# Altium PCB motordriver-v4.0.PcbDoc
Units mil, origin at the board's own origin, x right, y up, seen from the top; angles counter-clockwise.
Board outline 6000 x 4000 mil, 2 copper layers (Top Layer, Bottom Layer); 130 components, 113 nets, 485 pads, 0 vias.
Unrouted connection lines stored in the file: 282.
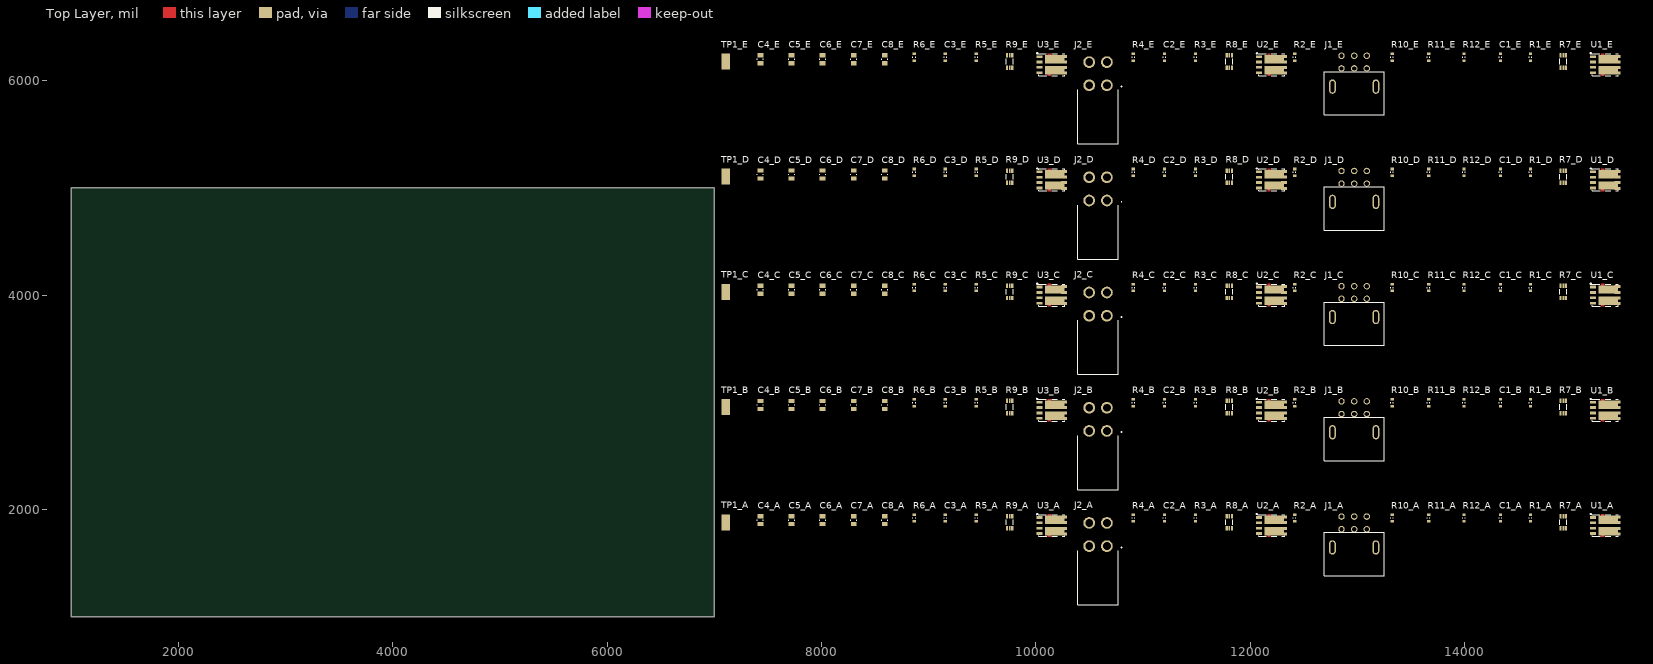
[diagram p0: Top Layer view]
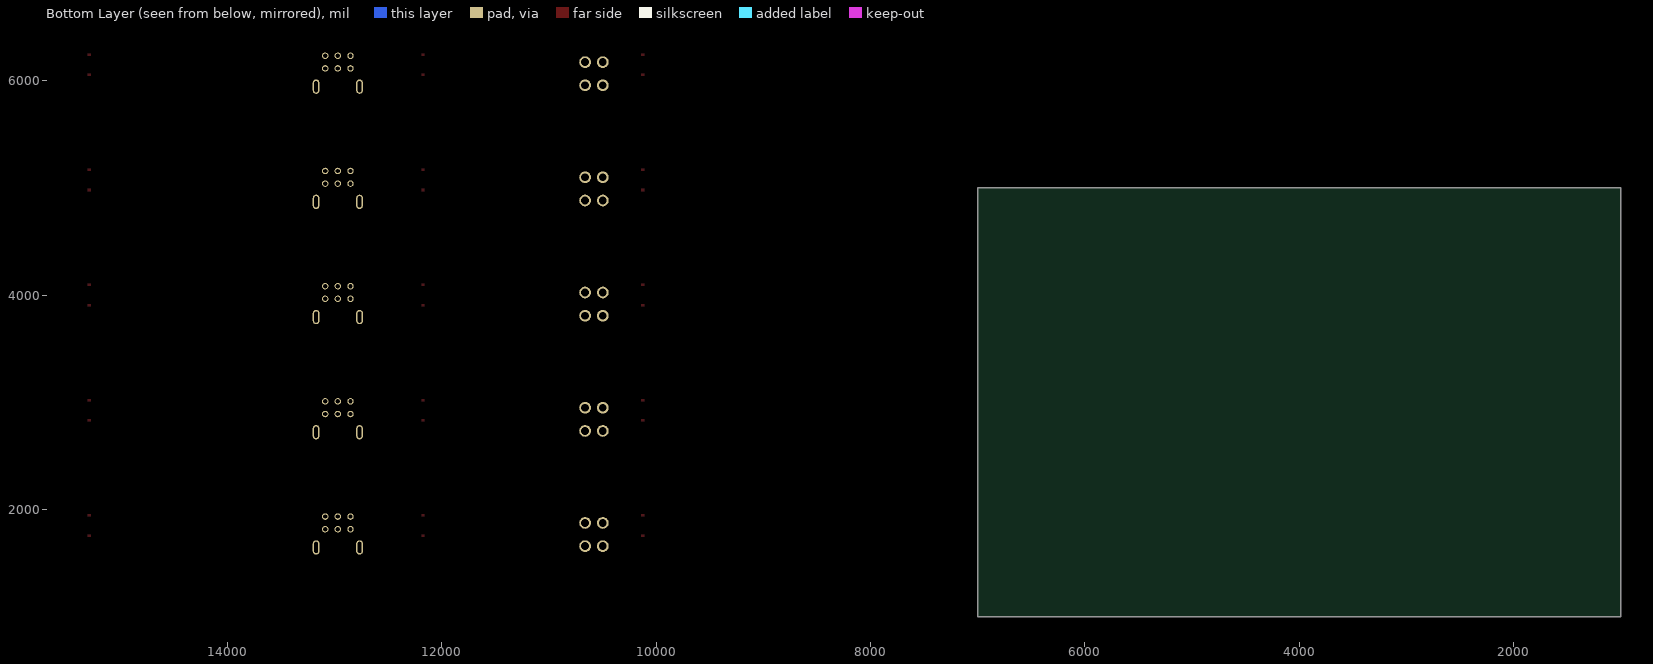
[diagram p1: Bottom Layer view, seen from below]

## Layer stack, top to bottom
Top Solder: solder mask 0.4, Solder Resist, Dk 3.5
Top Layer: signal copper 1.4
Dielectric 1: dielectric 12.6, FR-4, Dk 4.8
Bottom Layer: signal copper 1.4
Bottom Solder: solder mask 0.4, Solder Resist, Dk 3.5

## Board outline
1000,1000 7000,1000 7000,5000 1000,5000

## Design rules (kind name [scope] priority, off if disabled: settings)
Clearance [All] p1: gap=10 ignorepadtopadclearanceinfootprint=FALSE except(0: Arc-Hole Track-Hole SMDPad-Hole THPad-Hole Via-Hole Fill-Hole Poly-Hole Region-Hole Text-Hole)
PolygonConnect [All] p1: connectstyle=Relief reliefconductorwidth=10 reliefentries=4 polygonreliefangle="90 Angle" airgapwidth=10
RoomDefinition "Power Stage E" [InComponentClass('Power Stage E')] p1: confinementstyle=ConfineIn formatcopy=TRUE lockcomponents=FALSE outline 7045,5360 15470,5360 15470,6385 7045,6385
RoomDefinition "Power Stage D" [InComponentClass('Power Stage D')] p2: confinementstyle=ConfineIn formatcopy=TRUE lockcomponents=FALSE outline 7045,4285 15470,4285 15470,5310 7045,5310
RoomDefinition "Power Stage C" [InComponentClass('Power Stage C')] p3: confinementstyle=ConfineIn formatcopy=TRUE lockcomponents=FALSE outline 7045,3210 15470,3210 15470,4235 7045,4235
RoomDefinition "Power Stage B" [InComponentClass('Power Stage B')] p4: confinementstyle=ConfineIn formatcopy=TRUE lockcomponents=FALSE outline 7045,2135 15470,2135 15470,3160 7045,3160
RoomDefinition "Power Stage A" [InComponentClass('Power Stage A')] p5: confinementstyle=ConfineIn formatcopy=TRUE lockcomponents=FALSE outline 7045,1060 15470,1060 15470,2085 7045,2085
RoutingVias [All] p1: holewidth=28 width=50 viastyle="Through Hole" minholewidth=28 minwidth=50 maxholewidth=28 maxwidth=50
SolderMaskExpansion [All] p1: expansion=4 istentingtop=FALSE
Width [All] p1: maxlimit=10 minlimit=10 preferedwidth=10
30 further rules are at their usual default settings.

## Classes and differential pairs
channel class motordriver-v4.0_stspin: "STSPIN A" "STSPIN B" "STSPIN C" "STSPIN D" "STSPIN E"
component class "Power Stage E": C1_E C2_E C3_E C4_E C5_E C6_E C7_E C8_E J1_E J2_E R1_E R2_E R3_E R4_E R5_E R6_E R7_E R8_E R9_E R10_E R11_E R12_E TP1_E U1_E U2_E U3_E
component class "Power Stage D": C1_D C2_D C3_D C4_D C5_D C6_D C7_D C8_D J1_D J2_D R1_D R2_D R3_D R4_D R5_D R6_D R7_D R8_D R9_D R10_D R11_D R12_D TP1_D U1_D U2_D U3_D
component class "Power Stage C": C1_C C2_C C3_C C4_C C5_C C6_C C7_C C8_C J1_C J2_C R1_C R2_C R3_C R4_C R5_C R6_C R7_C R8_C R9_C R10_C R11_C R12_C TP1_C U1_C U2_C U3_C
component class "Power Stage B": C1_B C2_B C3_B C4_B C5_B C6_B C7_B C8_B J1_B J2_B R1_B R2_B R3_B R4_B R5_B R6_B R7_B R8_B R9_B R10_B R11_B R12_B TP1_B U1_B U2_B U3_B
component class "Power Stage A": C1_A C2_A C3_A C4_A C5_A C6_A C7_A C8_A J1_A J2_A R1_A R2_A R3_A R4_A R5_A R6_A R7_A R8_A R9_A R10_A R11_A R12_A TP1_A U1_A U2_A U3_A
channel class motordriver-v4.0_power-stage: "Power Stage 1" "Power Stage 2"

## Components (designator, comment, footprint, x,y, rotation, side; value= is the part's Value field where it differs from the comment)
C1_A "100nF 50V" 0603 14335,1920 r90 top value=100nF (schematic designator C1)
C1_B "100nF 50V" 0603 14335,2995 r90 top value=100nF (schematic designator C1)
C1_C "100nF 50V" 0603 14335,4070 r90 top value=100nF (schematic designator C1)
C1_D "100nF 50V" 0603 14335,5145 r90 top value=100nF (schematic designator C1)
C1_E "100nF 50V" 0603 14335,6220 r90 top value=100nF (schematic designator C1)
C2_A "100nF 50V" 0603 11200,1920 r90 top value=100nF (schematic designator C2)
C2_B "100nF 50V" 0603 11200,2995 r90 top value=100nF (schematic designator C2)
C2_C "100nF 50V" 0603 11200,4070 r90 top value=100nF (schematic designator C2)
C2_D "100nF 50V" 0603 11200,5145 r90 top value=100nF (schematic designator C2)
C2_E "100nF 50V" 0603 11200,6220 r90 top value=100nF (schematic designator C2)
C3_A "100nF 50V" 0603 9155,1920 r90 top value=100nF (schematic designator C3)
C3_B "100nF 50V" 0603 9155,2995 r90 top value=100nF (schematic designator C3)
C3_C "100nF 50V" 0603 9155,4070 r90 top value=100nF (schematic designator C3)
C3_D "100nF 50V" 0603 9155,5145 r90 top value=100nF (schematic designator C3)
C3_E "100nF 50V" 0603 9155,6220 r90 top value=100nF (schematic designator C3)
C4_A "10uF 50V" 0805 7430,1900 r90 top value=10uF (schematic designator C4)
C4_B "10uF 50V" 0805 7430,2975 r90 top value=10uF (schematic designator C4)
C4_C "10uF 50V" 0805 7430,4050 r90 top value=10uF (schematic designator C4)
C4_D "10uF 50V" 0805 7430,5125 r90 top value=10uF (schematic designator C4)
C4_E "10uF 50V" 0805 7430,6200 r90 top value=10uF (schematic designator C4)
C5_A "10uF 50V" 0805 7720,1900 r90 top value=10uF (schematic designator C5)
C5_B "10uF 50V" 0805 7720,2975 r90 top value=10uF (schematic designator C5)
C5_C "10uF 50V" 0805 7720,4050 r90 top value=10uF (schematic designator C5)
C5_D "10uF 50V" 0805 7720,5125 r90 top value=10uF (schematic designator C5)
C5_E "10uF 50V" 0805 7720,6200 r90 top value=10uF (schematic designator C5)
C6_A "10uF 50V" 0805 8010,1900 r90 top value=10uF (schematic designator C6)
C6_B "10uF 50V" 0805 8010,2975 r90 top value=10uF (schematic designator C6)
C6_C "10uF 50V" 0805 8010,4050 r90 top value=10uF (schematic designator C6)
C6_D "10uF 50V" 0805 8010,5125 r90 top value=10uF (schematic designator C6)
C6_E "10uF 50V" 0805 8010,6200 r90 top value=10uF (schematic designator C6)
C7_A "10uF 50V" 0805 8300,1900 r90 top value=10uF (schematic designator C7)
C7_B "10uF 50V" 0805 8300,2975 r90 top value=10uF (schematic designator C7)
C7_C "10uF 50V" 0805 8300,4050 r90 top value=10uF (schematic designator C7)
C7_D "10uF 50V" 0805 8300,5125 r90 top value=10uF (schematic designator C7)
C7_E "10uF 50V" 0805 8300,6200 r90 top value=10uF (schematic designator C7)
C8_A "10uF 50V" 0805 8590,1900 r90 top value=10uF (schematic designator C8)
C8_B "10uF 50V" 0805 8590,2975 r90 top value=10uF (schematic designator C8)
C8_C "10uF 50V" 0805 8590,4050 r90 top value=10uF (schematic designator C8)
C8_D "10uF 50V" 0805 8590,5125 r90 top value=10uF (schematic designator C8)
C8_E "10uF 50V" 0805 8590,6200 r90 top value=10uF (schematic designator C8)
J1_A "CN HDR 6POS Molex 43045-0622 (R)" 430450622 12970,1645 r0 top (schematic designator J1)
J1_B "CN HDR 6POS Molex 43045-0622 (R)" 430450622 12970,2720 r0 top (schematic designator J1)
J1_C "CN HDR 6POS Molex 43045-0622 (R)" 430450622 12970,3795 r0 top (schematic designator J1)
J1_D "CN HDR 6POS Molex 43045-0622 (R)" 430450622 12970,4870 r0 top (schematic designator J1)
J1_E "CN HDR 6POS Molex 43045-0622 (R)" 430450622 12970,5945 r0 top (schematic designator J1)
J2_A "CN HDR 4POS Molex 26013115 (R)" 26013115 10580,1370 r0 top (schematic designator J2)
J2_B "CN HDR 4POS Molex 26013115 (R)" 26013115 10580,2445 r0 top (schematic designator J2)
J2_C "CN HDR 4POS Molex 26013115 (R)" 26013115 10580,3520 r0 top (schematic designator J2)
J2_D "CN HDR 4POS Molex 26013115 (R)" 26013115 10580,4595 r0 top (schematic designator J2)
J2_E "CN HDR 4POS Molex 26013115 (R)" 26013115 10580,5670 r0 top (schematic designator J2)
R1_A "495k" 0603 14615,1920 r90 top (schematic designator R1)
R1_B "495k" 0603 14615,2995 r90 top (schematic designator R1)
R1_C "495k" 0603 14615,4070 r90 top (schematic designator R1)
R1_D "495k" 0603 14615,5145 r90 top (schematic designator R1)
R1_E "495k" 0603 14615,6220 r90 top (schematic designator R1)
R2_A "495k" 0603 12415,1920 r90 top (schematic designator R2)
R2_B "495k" 0603 12415,2995 r90 top (schematic designator R2)
R2_C "495k" 0603 12415,4070 r90 top (schematic designator R2)
R2_D "495k" 0603 12415,5145 r90 top (schematic designator R2)
R2_E "495k" 0603 12415,6220 r90 top (schematic designator R2)
R3_A "495k" 0603 11490,1920 r90 top (schematic designator R3)
R3_B "495k" 0603 11490,2995 r90 top (schematic designator R3)
R3_C "495k" 0603 11490,4070 r90 top (schematic designator R3)
R3_D "495k" 0603 11490,5145 r90 top (schematic designator R3)
R3_E "495k" 0603 11490,6220 r90 top (schematic designator R3)
R4_A "495k" 0603 10910,1920 r90 top (schematic designator R4)
R4_B "495k" 0603 10910,2995 r90 top (schematic designator R4)
R4_C "495k" 0603 10910,4070 r90 top (schematic designator R4)
R4_D "495k" 0603 10910,5145 r90 top (schematic designator R4)
R4_E "495k" 0603 10910,6220 r90 top (schematic designator R4)
R5_A "495k" 0603 9445,1920 r90 top (schematic designator R5)
R5_B "495k" 0603 9445,2995 r90 top (schematic designator R5)
R5_C "495k" 0603 9445,4070 r90 top (schematic designator R5)
R5_D "495k" 0603 9445,5145 r90 top (schematic designator R5)
R5_E "495k" 0603 9445,6220 r90 top (schematic designator R5)
R6_A "495k" 0603 8865,1920 r90 top (schematic designator R6)
R6_B "495k" 0603 8865,2995 r90 top (schematic designator R6)
R6_C "495k" 0603 8865,4070 r90 top (schematic designator R6)
R6_D "495k" 0603 8865,5145 r90 top (schematic designator R6)
R6_E "495k" 0603 8865,6220 r90 top (schematic designator R6)
R7_A "RES 20m 1W" "1206 - Sense" 14920,1880 r90 top (schematic designator R7)
R7_B "RES 20m 1W" "1206 - Sense" 14920,2955 r90 top (schematic designator R7)
R7_C "RES 20m 1W" "1206 - Sense" 14920,4030 r90 top (schematic designator R7)
R7_D "RES 20m 1W" "1206 - Sense" 14920,5105 r90 top (schematic designator R7)
R7_E "RES 20m 1W" "1206 - Sense" 14920,6180 r90 top (schematic designator R7)
R8_A "RES 20m 1W" "1206 - Sense" 11805,1880 r90 top (schematic designator R8)
R8_B "RES 20m 1W" "1206 - Sense" 11805,2955 r90 top (schematic designator R8)
R8_C "RES 20m 1W" "1206 - Sense" 11805,4030 r90 top (schematic designator R8)
R8_D "RES 20m 1W" "1206 - Sense" 11805,5105 r90 top (schematic designator R8)
R8_E "RES 20m 1W" "1206 - Sense" 11805,6180 r90 top (schematic designator R8)
R9_A "RES 20m 1W" "1206 - Sense" 9755,1880 r90 top (schematic designator R9)
R9_B "RES 20m 1W" "1206 - Sense" 9755,2955 r90 top (schematic designator R9)
R9_C "RES 20m 1W" "1206 - Sense" 9755,4030 r90 top (schematic designator R9)
R9_D "RES 20m 1W" "1206 - Sense" 9755,5105 r90 top (schematic designator R9)
R9_E "RES 20m 1W" "1206 - Sense" 9755,6180 r90 top (schematic designator R9)
R10_A "10k" 0603 13325,1920 r90 top (schematic designator R10)
R10_B "10k" 0603 13325,2995 r90 top (schematic designator R10)
R10_C "10k" 0603 13325,4070 r90 top (schematic designator R10)
R10_D "10k" 0603 13325,5145 r90 top (schematic designator R10)
R10_E "10k" 0603 13325,6220 r90 top (schematic designator R10)
R11_A "10k" 0603 13665,1920 r90 top (schematic designator R11)
R11_B "10k" 0603 13665,2995 r90 top (schematic designator R11)
R11_C "10k" 0603 13665,4070 r90 top (schematic designator R11)
R11_D "10k" 0603 13665,5145 r90 top (schematic designator R11)
R11_E "10k" 0603 13665,6220 r90 top (schematic designator R11)
R12_A "10k" 0603 13995,1920 r90 top (schematic designator R12)
R12_B "10k" 0603 13995,2995 r90 top (schematic designator R12)
R12_C "10k" 0603 13995,4070 r90 top (schematic designator R12)
R12_D "10k" 0603 13995,5145 r90 top (schematic designator R12)
R12_E "10k" 0603 13995,6220 r90 top (schematic designator R12)
TP1_A "Test Point - 5019" TP380X203 7105,1880 r90 top (schematic designator TP1)
TP1_B "Test Point - 5019" TP380X203 7105,2955 r90 top (schematic designator TP1)
TP1_C "Test Point - 5019" TP380X203 7105,4030 r90 top (schematic designator TP1)
TP1_D "Test Point - 5019" TP380X203 7105,5105 r90 top (schematic designator TP1)
TP1_E "Test Point - 5019" TP380X203 7105,6180 r90 top (schematic designator TP1)
U1_A "NOTE: Nearing End of Life" PG-TDSON-8-10 15315,1850 r0 top (schematic designator U1)
U1_B "NOTE: Nearing End of Life" PG-TDSON-8-10 15315,2925 r0 top (schematic designator U1)
U1_C "NOTE: Nearing End of Life" PG-TDSON-8-10 15315,4000 r0 top (schematic designator U1)
U1_D "NOTE: Nearing End of Life" PG-TDSON-8-10 15315,5075 r0 top (schematic designator U1)
U1_E "NOTE: Nearing End of Life" PG-TDSON-8-10 15315,6150 r0 top (schematic designator U1)
U2_A "NOTE: Nearing End of Life" PG-TDSON-8-10 12200,1850 r0 top (schematic designator U2)
U2_B "NOTE: Nearing End of Life" PG-TDSON-8-10 12200,2925 r0 top (schematic designator U2)
U2_C "NOTE: Nearing End of Life" PG-TDSON-8-10 12200,4000 r0 top (schematic designator U2)
U2_D "NOTE: Nearing End of Life" PG-TDSON-8-10 12200,5075 r0 top (schematic designator U2)
U2_E "NOTE: Nearing End of Life" PG-TDSON-8-10 12200,6150 r0 top (schematic designator U2)
U3_A "NOTE: Nearing End of Life" PG-TDSON-8-10 10150,1850 r0 top (schematic designator U3)
U3_B "NOTE: Nearing End of Life" PG-TDSON-8-10 10150,2925 r0 top (schematic designator U3)
U3_C "NOTE: Nearing End of Life" PG-TDSON-8-10 10150,4000 r0 top (schematic designator U3)
U3_D "NOTE: Nearing End of Life" PG-TDSON-8-10 10150,5075 r0 top (schematic designator U3)
U3_E "NOTE: Nearing End of Life" PG-TDSON-8-10 10150,6150 r0 top (schematic designator U3)

## Footprints (in the part's own frame and the unit in brackets; to place one, negate y for a bottom-side part, rotate by r counter-clockwise, add the part's x,y. Pads: shape width x height; smd on the part's side, far side on the other; paste and mask are expansions set on the pad)
0603 [mm] "Chip Resistor, 2-Leads, Body 1.60x0.80mm, IPC High Density"
  rect 0.6x0.8 smd: 1(-0.8,0) 2(0.8,0)
  silkscreen extent -0.1,-0.3 0.1,0.3, body extent -0.8,-0.4 0.8,0.4, height 0.6
0805 [mil]
  rect 40x55 smd: 1(-37,0) 2(37,0)
  silkscreen extent -4,-28 4,28, body extent -47,-28 47,28, height 24
"1206 - Sense" [mil] "4-Wire Sense Footprint"
  rect 41.34x20 smd: 1(-57,-24) 1(-57,24) 2(57,-24) 2(57,24)
  rect 41.34x15 smd paste+0: 3(-57,0) 4(57,0)
  silkscreen extent -24,-33 24,33
26013115 [mm]
  round 2.775 hole 1.85: 1(2.1,7.3) 2(-2.1,7.3) 3(2.1,12.8) 4(-2.1,12.8)
  round 1.525 hole 3.05 unplated: MH1(0,0)
  silkscreen extent -4.8,-6.6 5.6,7.05, body extent -4.8,-6.5 5.2,13.44, height 11.5
430450622 [mm]
  round 1.53 hole 1.02: 1(3,4.32) 2(0,4.32) 3(-3,4.32) 4(3,7.32) 5(0,7.32) 6(-3,7.32)
  round 0 hole 3: MH(0,0)
  oval 1.6x3.4 hole 0.8 slot 2.6 at 90 deg: MH1(5.15,0) MH2(-5.15,0)
  silkscreen extent -7.11,-6.71 7.11,3.56, body extent -6.62,-4.65 6.58,7.59, height 3.12
PG-TDSON-8-10 [mm] "Infineon specific mosfet array footprint"
  rect 1.4x0.65 smd paste-0.1: 1(-2.99,1.905) 2(-2.99,0.635) 3(-2.99,-0.635) 4(-2.99,-1.905)
  rect 4.6x2 smd paste-3: 6(0.625,-1.325) 8(0.625,1.325)
  rect 1.4x0.7 smd paste-0.1: 6(2.89,-1.99) 6(2.89,-0.66) 8(2.89,0.66) 8(2.89,1.99)
  Top Layer region: -1.04,2.1 -0.25,2.1 -0.25,2.7 -1.04,2.7
  Top Layer region: -1.04,-2.7 -0.25,-2.7 -0.25,-2.1 -1.04,-2.1
  silkscreen extent -3.6,-2.6 3.08,2.8, body extent -3.07,-2.57 3.08,2.58, height 1.1
TP380X203 [mm]
  rect 3.8x2.03 smd: 1(0,0)

## Part data
C1_A C1_B C1_C C1_D C1_E C2_A C2_B C2_C C2_D C2_E C3_A C3_B C3_C C3_D C3_E: library part "CAP 100nF 50V", "CAP CER 0.1UF 50V X7R 0805", Package=0805, Rating=50V, Tolerance=10%
C4_A C4_B C4_C C4_D C4_E C5_A C5_B C5_C C5_D C5_E C6_A C6_B C6_C C6_D C6_E C7_A C7_B C7_C C7_D C7_E C8_A C8_B C8_C C8_D C8_E: library part "CAP 10uF 50V", "CAP CER 10UF 50V X7R", Package=1210, Rating=50V, Tolerance=10%, ComponentLink1Description=digikey, ComponentLink1URL=https://www.digikey.ca/en/products/detail/kemet/C1210C106M5RACTU/4918883
J1_A J1_B J1_C J1_D J1_E: "Molex 43045-0622 6POS Microfit / dual row, right angle"
J2_A J2_B J2_C J2_D J2_E: "Molex 26013115 4POS Minifit / dual row, right angle"
R1_A R1_B R1_C R1_D R1_E R2_A R2_B R2_C R2_D R2_E R3_A R3_B R3_C R3_D R3_E R4_A R4_B R4_C R4_D R4_E R5_A R5_B R5_C R5_D R5_E R6_A R6_B R6_C R6_D R6_E: library part "RES 495k 1/8W", "RES SMD 499K OHM 1% 1/8W 0805", Case Code (Imperial)=0805, Case Code (Metric)=2012, Manufacturer=Yageo, Manufacturer Part Number=RC0805FR-07499KL, Max Operating Temperature=155°C, Min Operating Temperature=-55°C, Power Rating=125mW, Resistance=499kR, Supplier Part Number 1=311-499KCRCT-ND, Temperature Coefficient=100ppm/°C, Tolerance=1%, Voltage Rating=150V, Case/Package=0805, Category="Chip SMD Resistors", ComponentLink1Description=https://datasheet.ciiva.com/15189/getdatasheetpartid-326570-15189975.pdf?src-supplier=Verical, ComponentLink1URL=https://datasheet.ciiva.com/15189/getdatasheetpartid-326570-15189975.pdf?src-supplier=Verical, Composition="Thick Film", Contact Plating=Tin,Lead,Matte, Depth=1.25mm, Lead Free="Lead Free", Length=2mm, Military Standard=Not, Packaging="Tape and Reel", Pricing 1="1=0.10000, 10=0.04000, 100=0.01630, 1000=0.00731, 2500=0.00635 (USD)", Radiation Hardening=No, RoHS=Yes, Stock 1=2275, Supplier 1=Digi-Key, Termination=SMD/SMT, Voltage Rating (DC)=150V
R7_A R7_B R7_C R7_D R7_E R8_A R8_B R8_C R8_D R8_E R9_A R9_B R9_C R9_D R9_E: "RES SMD 0.02 OHM 1% 1W 1206"
R10_A R10_B R10_C R10_D R10_E R11_A R11_B R11_C R11_D R11_E R12_A R12_B R12_C R12_D R12_E: library part "RES 10k 1/8W - 1%", "RES SMD 10K OHM 1% 1/8W 0805", Package=0805, Power (Watts)=0.125W, Tolerance=1%
TP1_A TP1_B TP1_C TP1_D TP1_E: "PC Test Point, Miniature Phosphor Bronze, Silver Plating Surface Mount Mounting Type", Package="2010 Keystone", Digi-Key_Part_Number=36-5019CT-ND, Digi-Key_Purchase_URL=https://www.digikey.com/product-detail/en/keystone-electronics/5019/36-5019CT-ND/3907344?utm_source=snapeda&utm_medium=aggregator&utm_campaign=symbol, MF="Keystone Electronics", MP=5019
U1_A U1_B U1_C U1_D U1_E U2_A U2_B U2_C U2_D U2_E U3_A U3_B U3_C U3_D U3_E: library part "MOSFET IPG20N06S4-15A", "MOSFET N+N 60V 20A", Supplier Part Number 1=726-IPG20N06S415ATMA, MF="Infineon Technologies", MF P/N=IPG20N06S4-15A, Supplier 1=Mouser

## Nets (pads, with @x,y where several pads share a name; then routed paths per layer and width w, separated by ;. In a path a pad name is that pad's centre, name@x,y a point inside that pad or via, vN(x,y) a via of type N, cw(c..) or ccw(c..) an arc to the next point about the centre after c; other vN are vias at no path point)
5V: J1_A.5 J1_B.5 J1_C.5 J1_D.5 J1_E.5 R10_A.1 R10_B.1 R10_C.1 R10_D.1 R10_E.1 R11_A.1 R11_B.1 R11_C.1 R11_D.1 R11_E.1 R12_A.1 R12_B.1 R12_C.1 R12_D.1 R12_E.1
AGND: J1_A.4 J1_B.4 J1_C.4 J1_D.4 J1_E.4
GHA_A: R1_A.2 U1_A.2
GHA_B: R1_B.2 U1_B.2
GHA_C: R1_C.2 U1_C.2
GHA_D: R1_D.2 U1_D.2
GHA_E: R1_E.2 U1_E.2
GHB_A: R3_A.2 U2_A.2
GHB_B: R3_B.2 U2_B.2
GHB_C: R3_C.2 U2_C.2
GHB_D: R3_D.2 U2_D.2
GHB_E: R3_E.2 U2_E.2
GHC_A: R5_A.2 U3_A.2
GHC_B: R5_B.2 U3_B.2
GHC_C: R5_C.2 U3_C.2
GHC_D: R5_D.2 U3_D.2
GHC_E: R5_E.2 U3_E.2
GLA_A: R2_A.2 U1_A.4
GLA_B: R2_B.2 U1_B.4
GLA_C: R2_C.2 U1_C.4
GLA_D: R2_D.2 U1_D.4
GLA_E: R2_E.2 U1_E.4
GLB_A: R4_A.2 U2_A.4
GLB_B: R4_B.2 U2_B.4
GLB_C: R4_C.2 U2_C.4
GLB_D: R4_D.2 U2_D.4
GLB_E: R4_E.2 U2_E.4
GLC_A: R6_A.2 U3_A.4
GLC_B: R6_B.2 U3_B.4
GLC_C: R6_C.2 U3_C.4
GLC_D: R6_D.2 U3_D.4
GLC_E: R6_E.2 U3_E.4
GND_A: C1_A.1 C2_A.1 C3_A.1 C4_A.2 C5_A.2 C6_A.2 C7_A.2 C8_A.2 R2_A.1 R4_A.1 R6_A.1 TP1_A.1 U1_A.3 U2_A.3 U3_A.3
GND_B: C1_B.1 C2_B.1 C3_B.1 C4_B.2 C5_B.2 C6_B.2 C7_B.2 C8_B.2 R2_B.1 R4_B.1 R6_B.1 TP1_B.1 U1_B.3 U2_B.3 U3_B.3
GND_C: C1_C.1 C2_C.1 C3_C.1 C4_C.2 C5_C.2 C6_C.2 C7_C.2 C8_C.2 R2_C.1 R4_C.1 R6_C.1 TP1_C.1 U1_C.3 U2_C.3 U3_C.3
GND_D: C1_D.1 C2_D.1 C3_D.1 C4_D.2 C5_D.2 C6_D.2 C7_D.2 C8_D.2 R2_D.1 R4_D.1 R6_D.1 TP1_D.1 U1_D.3 U2_D.3 U3_D.3
GND_E: C1_E.1 C2_E.1 C3_E.1 C4_E.2 C5_E.2 C6_E.2 C7_E.2 C8_E.2 R2_E.1 R4_E.1 R6_E.1 TP1_E.1 U1_E.3 U2_E.3 U3_E.3
M_H1_A: J1_A.1 R12_A.2
M_H1_B: J1_B.1 R12_B.2
M_H1_C: J1_C.1 R12_C.2
M_H1_D: J1_D.1 R12_D.2
M_H1_E: J1_E.1 R12_E.2
M_H2_A: J1_A.2 R11_A.2
M_H2_B: J1_B.2 R11_B.2
M_H2_C: J1_C.2 R11_C.2
M_H2_D: J1_D.2 R11_D.2
M_H2_E: J1_E.2 R11_E.2
M_H3_A: J1_A.3 R10_A.2
M_H3_B: J1_B.3 R10_B.2
M_H3_C: J1_C.3 R10_C.2
M_H3_D: J1_D.3 R10_D.2
M_H3_E: J1_E.3 R10_E.2
NetR1_A_1: R1_A.1 R7_A.1 U1_A.1 U1_A.6
NetR1_B_1: R1_B.1 R7_B.1 U1_B.1 U1_B.6
NetR1_C_1: R1_C.1 R7_C.1 U1_C.1 U1_C.6
NetR1_D_1: R1_D.1 R7_D.1 U1_D.1 U1_D.6
NetR1_E_1: R1_E.1 R7_E.1 U1_E.1 U1_E.6
NetR3_A_1: R3_A.1 R8_A.1 U2_A.1 U2_A.6
NetR3_B_1: R3_B.1 R8_B.1 U2_B.1 U2_B.6
NetR3_C_1: R3_C.1 R8_C.1 U2_C.1 U2_C.6
NetR3_D_1: R3_D.1 R8_D.1 U2_D.1 U2_D.6
NetR3_E_1: R3_E.1 R8_E.1 U2_E.1 U2_E.6
NetR5_A_1: R5_A.1 R9_A.1 U3_A.1 U3_A.6
NetR5_B_1: R5_B.1 R9_B.1 U3_B.1 U3_B.6
NetR5_C_1: R5_C.1 R9_C.1 U3_C.1 U3_C.6
NetR5_D_1: R5_D.1 R9_D.1 U3_D.1 U3_D.6
NetR5_E_1: R5_E.1 R9_E.1 U3_E.1 U3_E.6
NetR7_A_3: R7_A.3
NetR7_A_4: R7_A.4
NetR7_B_3: R7_B.3
NetR7_B_4: R7_B.4
NetR7_C_3: R7_C.3
NetR7_C_4: R7_C.4
NetR7_D_3: R7_D.3
NetR7_D_4: R7_D.4
NetR7_E_3: R7_E.3
NetR7_E_4: R7_E.4
NetR8_A_3: R8_A.3
NetR8_A_4: R8_A.4
NetR8_B_3: R8_B.3
NetR8_B_4: R8_B.4
NetR8_C_3: R8_C.3
NetR8_C_4: R8_C.4
NetR8_D_3: R8_D.3
NetR8_D_4: R8_D.4
NetR8_E_3: R8_E.3
NetR8_E_4: R8_E.4
NetR9_A_3: R9_A.3
NetR9_A_4: R9_A.4
NetR9_B_3: R9_B.3
NetR9_B_4: R9_B.4
NetR9_C_3: R9_C.3
NetR9_C_4: R9_C.4
NetR9_D_3: R9_D.3
NetR9_D_4: R9_D.4
NetR9_E_3: R9_E.3
NetR9_E_4: R9_E.4
SA_A: J2_A.3 R7_A.2
SA_B: J2_B.3 R7_B.2
SA_C: J2_C.3 R7_C.2
SA_D: J2_D.3 R7_D.2
SA_E: J2_E.3 R7_E.2
SB_A: J2_A.1 R8_A.2
SB_B: J2_B.1 R8_B.2
SB_C: J2_C.1 R8_C.2
SB_D: J2_D.1 R8_D.2
SB_E: J2_E.1 R8_E.2
SC_A: J2_A.2 R9_A.2
SC_B: J2_B.2 R9_B.2
SC_C: J2_C.2 R9_C.2
SC_D: J2_D.2 R9_D.2
SC_E: J2_E.2 R9_E.2
VCC: C1_A.2 C1_B.2 C1_C.2 C1_D.2 C1_E.2 C2_A.2 C2_B.2 C2_C.2 C2_D.2 C2_E.2 C3_A.2 C3_B.2 C3_C.2 C3_D.2 C3_E.2 C4_A.1 C4_B.1 C4_C.1 C4_D.1 C4_E.1 C5_A.1 C5_B.1 C5_C.1 C5_D.1 C5_E.1 C6_A.1 C6_B.1 C6_C.1 C6_D.1 C6_E.1 C7_A.1 C7_B.1 C7_C.1 C7_D.1 C7_E.1 C8_A.1 C8_B.1 C8_C.1 C8_D.1 C8_E.1 U1_A.8 U1_B.8 U1_C.8 U1_D.8 U1_E.8 U2_A.8 U2_B.8 U2_C.8 U2_D.8 U2_E.8 U3_A.8 U3_B.8 U3_C.8 U3_D.8 U3_E.8
pads on no net: J1_A.6 J1_A.MH J1_A.MH1 J1_A.MH2 J1_B.6 J1_B.MH J1_B.MH1 J1_B.MH2 J1_C.6 J1_C.MH J1_C.MH1 J1_C.MH2 J1_D.6 J1_D.MH J1_D.MH1 J1_D.MH2 J1_E.6 J1_E.MH J1_E.MH1 J1_E.MH2 J2_A.4 J2_A.MH1 J2_B.4 J2_B.MH1 J2_C.4 J2_C.MH1 J2_D.4 J2_D.MH1 J2_E.4 J2_E.MH1